# EAGLE board untitled (EAGLE 9.6.2)
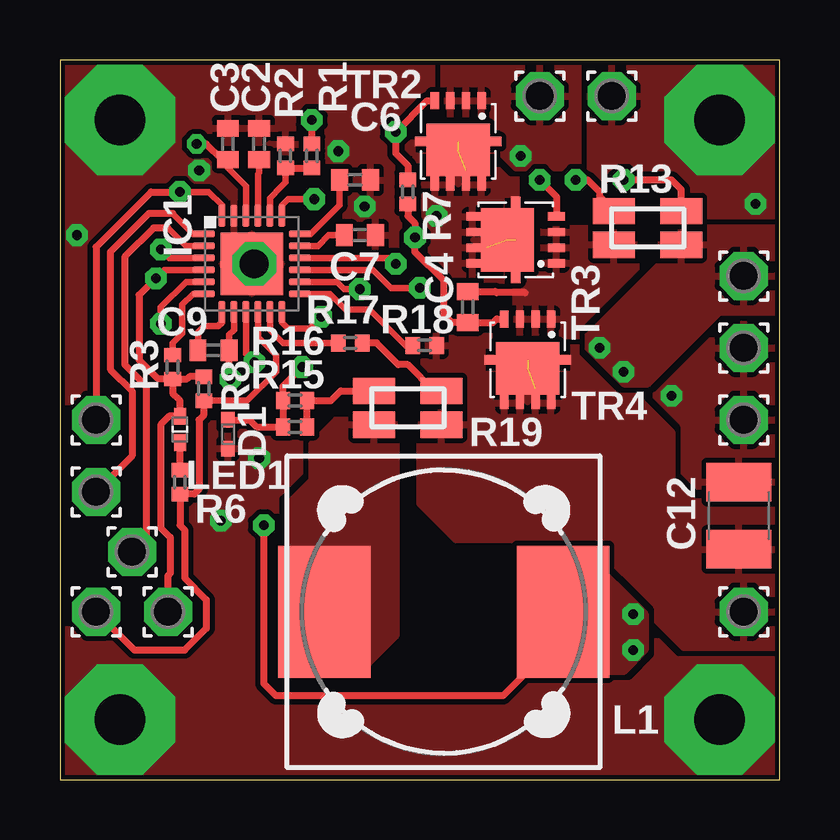
[diagram p0: board, top side]
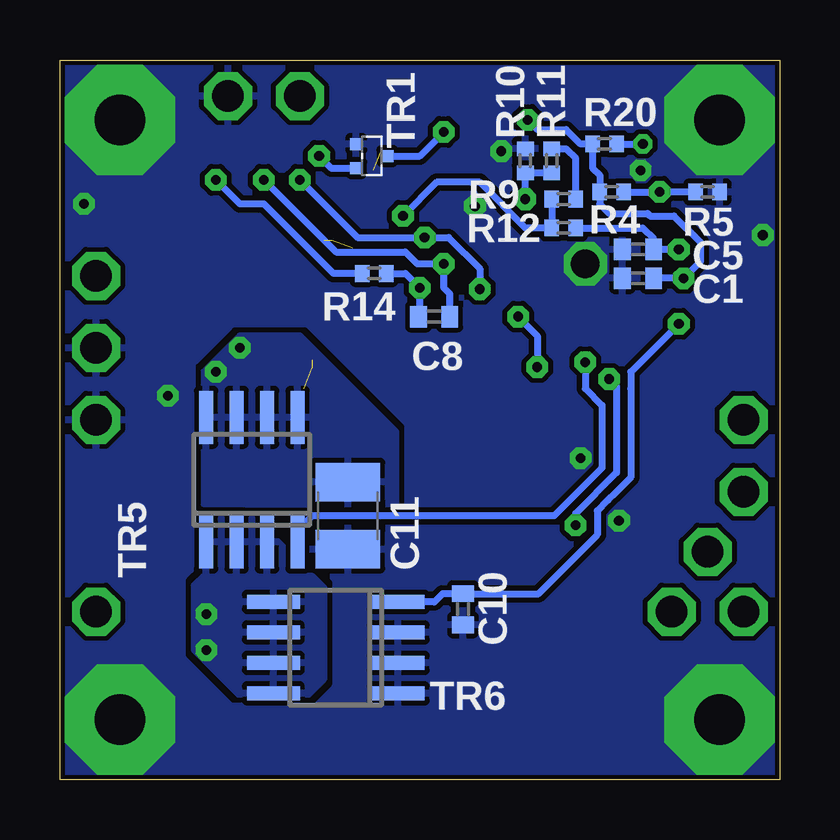
[diagram p1: board, bottom side, seen from below]

Size 30 x 30 mm. Coordinates in mm from the lower left corner, seen from the top.
Outline: 0,0 30,0 30,30 0,30 0,0
Copper layers (1*16): Top 0.035mm / dielectric 1.5mm / Bottom 0.035mm
Design rules "SeeedStudio_2layer_DRU_no_angle_20140221_IMD555 *": minimum track width 0.2mm, minimum drill 0.3mm, track to track 0.21mm, track to pad 0.21mm, pad to pad 0.21mm, via to via 0.21mm, smd to smd 0.00508125mm, copper to edge 0.2mm, drill to drill 10mil, minimum pad ring 0.25mm, minimum via ring 0.2mm, stop-mask expansion 0.03mm, vias tented up to drill 5mm, thermal gap 0.21mm

## Footprints (pad centres in the part's own frame; a part is rotated, then mirrored left to right if it is on the bottom)
C0402 = smd 0.7 x 0.9: 1 -0.65,0; 2 0.65,0
C1210 = smd 1.6 x 2.7: 1 -1.4,0; 2 1.4,0
VMN2 = smd 0.65 x 0.55: A 0.6,0; C -0.6,0
TQFN24-EP = smd 0.9 x 0.28: 1 -2,1.25; 2 -2,0.75; 3 -2,0.25; 4 -2,-0.25; 5 -2,-0.75; 6 -2,-1.25; 13 2,-1.25; 14 2,-0.75; 15 2,-0.25; 16 2,0.25; 17 2,0.75; 18 2,1.25 | smd 0.28 x 0.9: 7 -1.25,-2; 8 -0.75,-2; 9 -0.25,-2; 10 0.25,-2; 11 0.75,-2; 12 1.25,-2; 19 1.25,2; 20 0.75,2; 21 0.25,2; 22 -0.25,2; 23 -0.75,2; 24 -1.25,2 | smd 2.6 x 2.6: EXP 0,0
DR125 = smd 3.85 x 5.5: 1 -4.975,0; 2 4.975,0
CHIP-LED1005 = smd 0.5 x 0.7: A 0,-0.55; C 0,0.55
2.0/1.3 = drill 1.3 pad 2 octagon: 1 0,0
R0402 = smd 0.6 x 0.7: 1 -0.5,0; 2 0.5,0
L4T12 = smd 1.75 x 1.1: A 1.4,-0.7; B -1.4,-0.7; SA 1.4,0.7; SB -1.4,0.7
SOT523 = smd 0.5 x 0.5: 1 -0.5,-0.65; 2 0.5,-0.65; 3 0,0.65
TSON_ADVANCE = smd 0.35 x 0.7: 1 -0.975,-1.7; 2 -0.325,-1.7; 3 0.325,-1.7; 4 0.975,-1.7 | smd 0.35 x 1.7: 5 0.975,1.2; 6 0.325,1.2; 7 -0.325,1.2; 8 -0.975,1.2 | smd 0.35 x 0.5: 5_ 0.975,1.8; 8_ -0.975,1.8 | smd 2.65 x 2.2: EP 0,0.35 | smd 3.6 x 0.4: EP2 0,0
SO-08 = smd 0.6 x 2.2: 1 -1.905,-2.6; 2 -0.635,-2.6; 3 0.635,-2.6; 4 1.905,-2.6; 5 1.905,2.6; 6 0.635,2.6; 7 -0.635,2.6; 8 -1.905,2.6

## Placement (x,y rotation side)
C1  1u  [C0402]  5.9,20.9 180 bottom
C2  1u  [C0402]  8.3,26.5 90 top
C3  1u  [C0402]  7,26.5 90 top
C4  0.01u  [C0402]  17,19.7 270 top
C5  1u  [C0402]  5.9,22.1 180 bottom
C6  0.1u  [C0402]  12.3,25 0 top
C7  0.01u  [C0402]  12.5,22.7 0 top
C8  1u  [C0402]  14.4,19.3 180 bottom
C9  0.1u  [C0402]  6.4,17.9 0 top
C10  1000p  [C0402]  13.2,7.1 270 bottom
C11  22u  [C1210]  18,11 270 bottom
C12  22u  [C1210]  28.3,11 90 top
D1  [VMN2]  7,14.4 270 top
IC1  MAX17435  [TQFN24-EP]  8,21.5 0 top
L1  4.7u PA4343.472ANLT  [DR125]  16,7 180 top
LED1  [CHIP-LED1005]  5,14.6 180 top
PAD1  LDO  [2.0/1.3]  4.5,7 0 top
PAD2  !ACOK  [2.0/1.3]  1.5,7 0 top
PAD3  EN  [2.0/1.3]  1.5,15 0 top
PAD4  SCL  [2.0/1.3]  1.5,12 0 top
PAD5  SDA  [2.0/1.3]  3,9.5 0 top
PAD6  CHG  [2.0/1.3]  20,28.5 0 top
PAD7  GND  [2.0/1.3]  23,28.5 0 top
PAD8  LOAD  [2.0/1.3]  28.5,21 0 top
PAD9  GND  [2.0/1.3]  28.5,18 0 top
PAD10  BAT  [2.0/1.3]  28.5,7 0 top
PAD11  GND  [2.0/1.3]  28.5,15 0 top
R1  100k  [R0402]  10.5,26 90 top
R2  10k  [R0402]  9.4,26 270 top
R3  10k  [R0402]  4.7,17.2 270 top
R4  10k  [R0402]  7,24.5 180 bottom
R5  xxx  [R0402]  3,24.5 180 bottom
R6  1k  [R0402]  5,12.4 90 top
R7  100k  [R0402]  14.5,24.5 90 top
R8  10k  [R0402]  6,16.3 90 top
R9  33k  [R0402]  9,24.2 180 bottom
R10  10k  [R0402]  10.6,25.8 90 bottom
R11  100k  [R0402]  9.5,25.8 90 bottom
R12  10  [R0402]  9,23 180 bottom
R13  10m  [L4T12]  24.5,23 0 top
R14  1k  [R0402]  16.9,21.1 0 bottom
R15  10  [R0402]  9.8,14.7 0 top
R16  10  [R0402]  9.8,15.8 0 top
R17  10  [R0402]  12.1,18.2 0 top
R18  10  [R0402]  15.2,18.1 0 top
R19  10m  [L4T12]  14.5,15.5 0 top
R20  10  [R0402]  7.3,26.5 0 bottom
TR1  DMG1012T  [SOT523]  17,26 270 bottom
TR2  TPN2R203NC  [TSON_ADVANCE]  16.6,26.6 180 top
TR3  TPN2R203NC  [TSON_ADVANCE]  19,22.5 90 top
TR4  SiSH625DN  [TSON_ADVANCE]  19.5,17.5 180 top
TR5  FDS8884  [SO-08]  22,12.5 0 bottom
TR6  FDS6690AS  [SO-08]  18.5,5.5 90 bottom

## Library data of the parts
C1-C12 = rcl; SPICEPREFIX: C
D1 = 5 D
IC1 LED1 TR1-TR4 = 0 my parts
L1 = inductors; SPICEPREFIX: L
PAD1-PAD11 = 4 PAD
R1-R12 R14-R18 R20 = rcl; SPICEPREFIX: R
R13 R19 = 0 my parts; OC_FARNELL: unknown; OC_NEWARK: unknown
TR5 TR6 = transistor-power

## Nets
GND: C1.2 C2.2 C3.2 C5.2 C6.2 C7.2 C10.2 C11.2 C12.2 D1.A IC1.23 IC1.EXP PAD7.1 PAD9.1 PAD11.1 R2.1 R5.1 R10.2 TR1.1 TR6.1 TR6.2 TR6.3
N$1: C4.1 R13.B TR3.1 TR3.2 TR3.3 TR4.1 TR4.2 TR4.3
N$2: C8.2 IC1.15 R14.2
N$3: C8.1 IC1.16 R13.SB
N$4: D1.C IC1.12 R15.1 R16.1
N$5: C11.1 PAD8.1 R13.A TR5.5 TR5.6 TR5.7 TR5.8
N$6: R17.2 R19.SA
N$7: LED1.C R6.2
N$8: R9.1 R11.2
N$9: R13.SA R14.1
N$10: C3.1 IC1.22 R20.2
N$25: C9.1 IC1.7
N$30: R9.2 R12.2 TR2.5 TR2.5_ TR2.6 TR2.7 TR2.8 TR2.8_ TR2.EP TR2.EP2 TR3.5 TR3.5_ TR3.6 TR3.7 TR3.8 TR3.8_ TR3.EP TR3.EP2
N$32: C9.2 IC1.8 L1.1 TR5.1 TR5.2 TR5.3 TR6.5 TR6.6 TR6.7 TR6.8
N$33: L1.2 R19.B
N$34: R7.2 TR1.3 TR2.4
N$35: C12.1 PAD10.1 R18.2 R19.A TR4.5 TR4.5_ TR4.6 TR4.7 TR4.8 TR4.8_ TR4.EP TR4.EP2
N$36: R15.2 R16.2 R19.SB
N$37: IC1.11 R17.1
N$38: IC1.13 R18.1
N$39: C6.1 IC1.18
N$40: C7.1 IC1.17
N$41: IC1.20 R1.1 R2.2
N$42: C1.1 IC1.4 LED1.A PAD1.1 R1.2 R3.2 R4.2 R8.2 R20.1
N$45: C2.1 IC1.21
N$46: IC1.24 PAD3.1 R4.1 R5.2
N$47: IC1.10 PAD2.1 R6.1 R8.1
N$48: IC1.6 R3.1
N$51: IC1.9 TR5.4
N$52: C10.1 IC1.5 TR6.4
N$53: IC1.1 PAD4.1
N$54: IC1.2 PAD5.1
N$55: C5.1 IC1.3 R12.1
N$56: IC1.19 R10.1 R11.1
N$57: C4.2 IC1.14 R7.1 TR3.4 TR4.4
N$66: PAD6.1 TR1.2 TR2.1 TR2.2 TR2.3

## Tracks (layer width: path | path; a pad name or v marks a point on that pad's centre or on a via)
GND  (via drill 0.4 pad 0.9, 1.2, 2.1 pad 4.6)
  other vias: 25.5,16 29,24 0.7,22.7 8.1,21.5 12.7,23.9 11.6,26.2 5.8,25.4 8.3,13.4 6.7,10.8 2.5,2.5 27.5,2.5 27.5,27.5 2.5,27.5
  pour Top (rank 6): 0,30 30,30 30,0 0,0
  pour Bottom (rank 6): 0,30 30,30 30,0 0,0
N$1
  Top 0.3: C4.1 18.15,20.35 18.2,20.3 19.4,20.3
  pour Top (rank 2): 19,23 24,23 24,18.5 19,18.5
N$2  (via drill 0.4 pad 0.9)
  Top 0.27: IC1.15 13.05,21.25 13.8,20.5 v15,20.5
  Bottom 0.3: R14.2 15.6,21.1 v15,20.5 15,19.35 C8.2
N$3  (via drill 0.4 pad 0.9)
  Top 0.27: IC1.16 13.75,21.75 v14,21.5
  Top 0.3: R13.SB 22.5,24.3 22.5,24.5 22,25 v21.5,25
  Bottom 0.3: v21.5,25 18.5,22 15.6,22 15.1,21.5 v14,21.5 14,20.5 13.75,20.25 C8.1
N$4  (via drill 0.4 pad 0.9)
  Top 0.27: IC1.12 9.25,19.05 9.5,18.8 10.4,18.8 v10.9,19.3
  Top 0.3: v10.1,17.2 9.3,16.4 R16.1 R15.1 8.2,14.7 7.9,15 D1.C
  Bottom 0.3: v10.9,19.3 10.1,18.5 v10.1,17.2
N$5  (via drill 0.4 pad 0.9)
  other vias: 23.5,17 22.5,18
  pour Bottom (rank 5): 20,18.5 22.5,18.5 24,17 24,11.5 16,11.5 16,14.5
  pour Top: 30,23 25,23 25,21.5 22,18.5 22,18 23.5,16.5 24.5,16.5 27.5,19.5 30,19.5
N$6
  Top 0.3: R17.2 13.2,18.2 14.1,17.3 14.5,17.3 15.6,16.2 R19.SA
N$7
  Top 0.3: R6.2 LED1.C
N$8
  Bottom 0.3: R9.1 8.5,25.9 8.9,26.3 R11.2
N$9  (via drill 0.4 pad 0.9)
  Top 0.3: R13.SA 25.9,24.6 25.5,25 v23.5,25
  Bottom 0.3: v23.5,25 22.5,24 21.5,24 18.6,21.1 R14.1
N$10  (via drill 0.4)
  Top 0.27: IC1.22 7.75,24.75 7,25.5 C3.1
  Top 0.3: C3.1 6.75,25.85 6.1,26.5 v5.7,26.5
  Bottom 0.3: R20.2 v5.7,26.5
N$25
  Top 0.27: IC1.7 6.75,19.05 6.6,18.9 6,18.9 5.75,18.65 C9.1
N$30  (via drill 0.4 pad 0.9)  (4 unrouted)
  Bottom 0.3: R9.2 R12.2 10.6,23 12.5,24.9 14.3,24.9 v15.7,23.5
  pour Top (rank 5): 14.5,27 19,27 19,20 14.5,20
N$32  (via drill 0.4 pad 0.9)
  Top 0.27: IC1.8 7.25,18.75 7.05,18.55 C9.2
  Top 0.3: L1.1 20.98,6 18.48,3.5 9,3.5 8.5,4 v8.5,10.6 | v7.1,16.7 7.05,16.75 C9.2
  Bottom 0.3: v7.1,16.7 6.8,16.4 6.8,12.8 8.5,11.1 v8.5,10.6
  other vias: 23.9,5.4 23.9,6.9
  pour Bottom (rank 4): 19.7,3.5 19,4.2 19,8 22,11 24,11 24,8.5 24.4,8.1 24.4,5.4 22.5,3.5
  pour Top (no thermals): 19.5,9.5 21.8,9.5 24.4,6.9 24.4,5.4 23.5,4.5 19.5,4.5
N$33
  pour Top (no thermals): 9.5,9.5 9.5,11.5 11,13 12,13 14,11 14,6 12.5,4.5 11,4.5 10,5.5 10,9
  pour Top: 10.5,10.5 10.5,14 11.5,15 14,15 14,10.5
N$34  (via drill 0.4 pad 0.9)
  Top 0.3: R7.2 14.5,25.6 14,26.1 v14,27 15.3,28.3 TR2.4
  Bottom 0.3: v14,27 15,26 TR1.3
N$35  (2 unrouted)
  pour Top (rank 3): 15,18.5 21.5,18.5 25.5,14.5 25.5,12.5 26.4,11.6 30,11.6 30,5.5 26,5.5 21.5,10 16.5,10 15,11.5
N$36
  Top 0.3: R15.2 R16.2 11.3,15.8 11.7,16.2 R19.SB
N$37
  Top 0.27: R17.1 9.3,18.2 8.75,18.75 IC1.11
N$38
  Top 0.27: IC1.13 11.25,20.25 11.9,19.6 12.9,19.6 14.4,18.1 R18.1
N$39
  Top 0.27: IC1.18 10.45,22.75 11,23.3 11.65,23.95 C6.1
N$40
  Top 0.27: IC1.17 10.75,22.25 11.2,22.7 C7.1
N$41
  Top 0.27: IC1.20 8.75,24.25 9.2,24.7 9.4,24.9 R2.2
  Top 0.3: R2.2 R1.1
N$42  (via drill 0.4 pad 0.9)
  Top 0.27: IC1.4 4.35,21.25 v4,20.9
  Top 0.3: R1.2 v10.5,27.5 | v4,20.9 3.3,20.2 3.3,17.5 4.1,16.7 R3.2 | R8.2 5.4,16.8 5.3,16.7 R3.2 | PAD1.1 4.5,8.5 4.6,8.6 4.6,10.1 4.2,10.5 4.2,14.8 4.55,15.15 LED1.A 5,15.8 4.7,16.1 R3.2
  Bottom 0.3: v10.5,27.5 10.1,27.1 8.9,27.1 8.3,26.5 R20.1 7.8,25.5 7.5,25.2 R4.2 7.5,24 7.1,23.6 5.5,23.6 5.4,23.5 4.4,23.5 3.3,22.4 3.3,21.6 v4,20.9 C1.1
N$45
  Top 0.27: IC1.21 8.25,25.25 8.3,25.3 C2.1
N$46  (via drill 0.4 pad 0.9)
  Top 0.27: IC1.24 6.75,23.95 6.2,24.5 v5,24.5
  Top 0.3: PAD3.1 1.5,22.2 3.8,24.5 v5,24.5
  Bottom 0.3: R4.1 v5,24.5 R5.2
N$47
  Top 0.27: IC1.10 8.25,18.45 9,17.7 9,17 7.8,15.8 R8.1
  Top 0.3: PAD2.1 3.1,5.4 5.2,5.4 6.1,6.3 6.1,7.5 5.2,8.4 5.2,10.4 5,10.6 R6.1 5.6,11.9 5.8,12.1 5.8,15 6,15.2 R8.1
N$48
  Top 0.27: IC1.6 5.55,20.25 5.1,19.8 5.1,18.6 4.7,18.2 R3.1
N$51  (via drill 0.4 pad 0.9)
  Top 0.27: IC1.9 7.75,17.75 v8.1,17.4
  Bottom 0.3: TR5.4 20.09,10.4 19.5,11 9.4,11 7.4,13 7.4,15.6 8.1,16.3 v8.1,17.4
N$52  (via drill 0.4 pad 0.9)
  Top 0.27: IC1.5 5.25,20.75 4.2,19.7 v4.2,19
  Bottom 0.3: v4.2,19 6.2,17 6.2,16.3 6.2,12.6 6.8,12 7.15,11.65 7.6,11.2 7.6,10.2 10.05,7.75 C10.1 14.05,7.75 14.39,7.41 TR6.4
N$53
  Top 0.27: IC1.1 5.55,22.75 4.7,23.6
  Top 0.3: PAD4.1 3,13.5 3,16.2 2.1,17.1 2.1,22 3.7,23.6 4.7,23.6
N$54
  Top 0.27: IC1.2 5.25,22.25 4.5,23
  Top 0.3: PAD5.1 3.6,10.1 3.6,16.4 2.7,17.3 2.7,21.8 3.9,23 4.5,23
N$55  (via drill 0.4 pad 0.9)
  Top 0.27: IC1.3 4.55,21.75 v4.2,22.1
  Bottom 0.3: v4.2,22.1 C5.1 5.25,22.55 5.7,23 R12.1
N$56  (via drill 0.4 pad 0.9)
  Top 0.27: IC1.19 9.25,23.95 9.5,24.2 v10.6,24.2
  Bottom 0.3: v10.6,24.2 R10.1 R11.1
N$57  (via drill 0.4 pad 0.9)
  Top 0.27: v12.5,20.45 11.85,20.45 11.55,20.75 IC1.14
  Top 0.3: TR4.4 18.2,19.2 18.05,19.05 C4.2 16.35,19.05 16,19.4 16,20.8 14.8,22 v14.8,22.6 14.8,23.2 14.5,23.5 R7.1 | v20,25 20.7,24.3 TR3.4
  Bottom 0.3: v20,25 17.6,22.6 v14.8,22.6 13.8,22.6 12.5,21.3 v12.5,20.45
N$66  (via drill 0.4 pad 0.9)
  Bottom 0.3: v19.2,26 18.7,25.5 TR1.2
  pour Top (rank 4): 16,30 21.6,30 21.6,25.5 19,25.5 17,27.5 16,27.5